# Altium PCB 24.067.PcbDoc
Units mm, origin at the board's own origin, x right, y up, seen from the top; angles counter-clockwise.
Board outline 37 x 22 mm, 2 copper layers (Top Layer, Bottom Layer); 3 components, 16 nets, 33 pads, 0 vias.
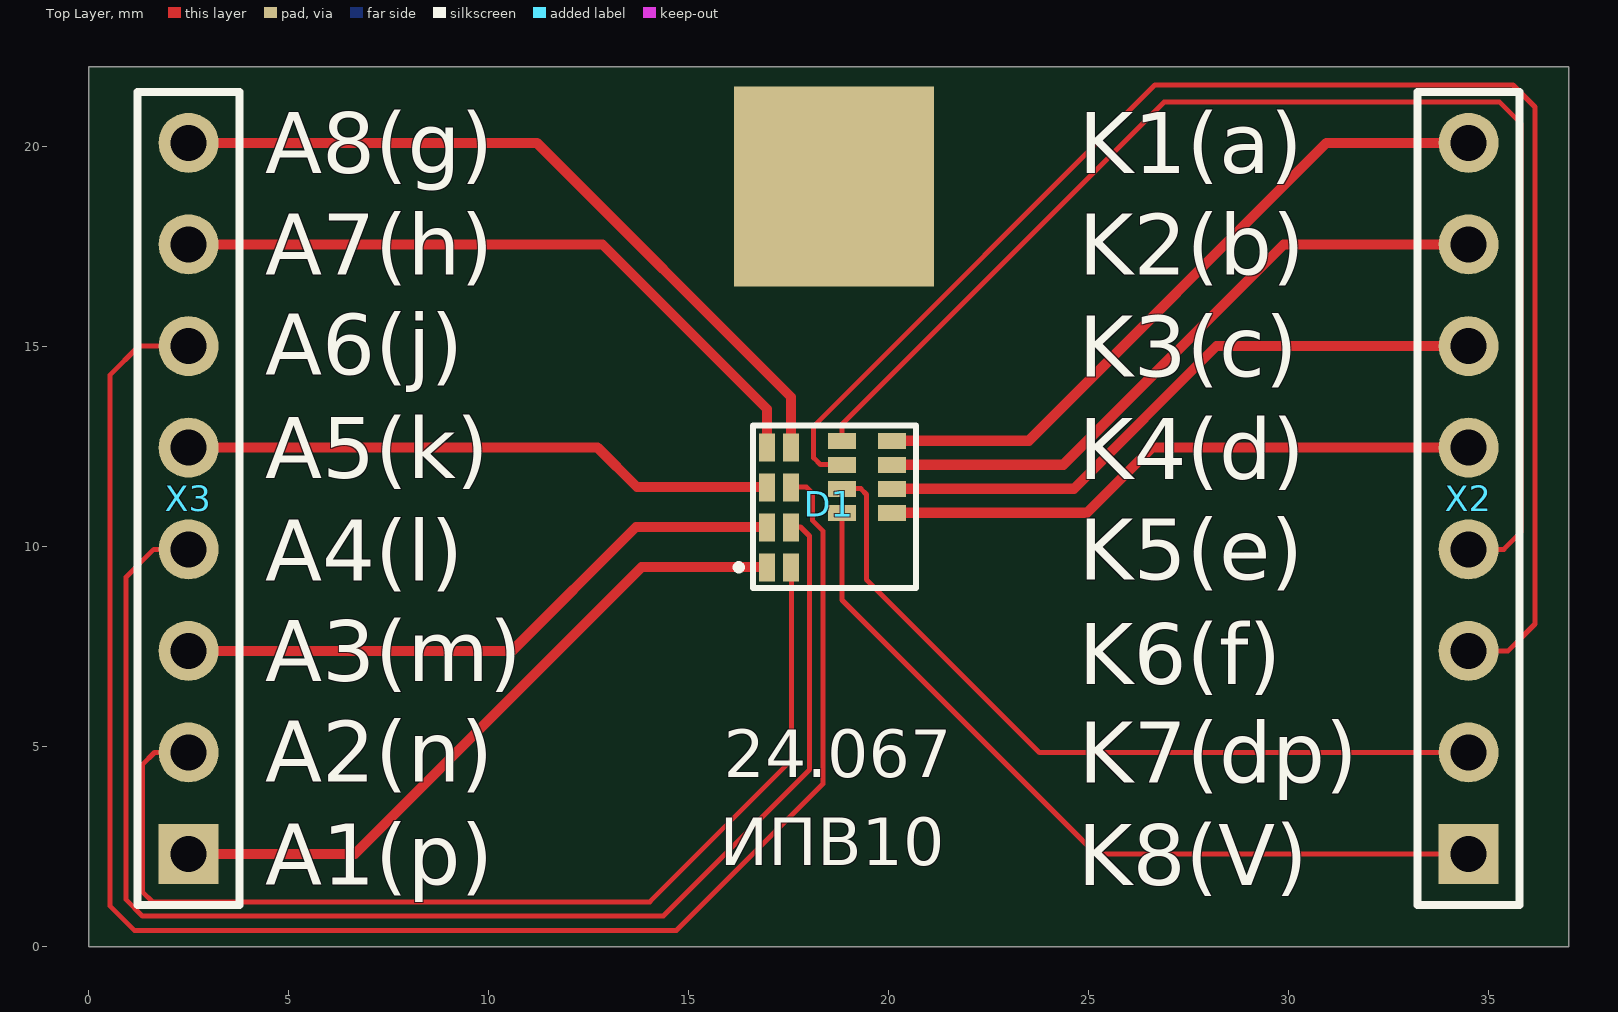
[diagram p0: Top Layer view]
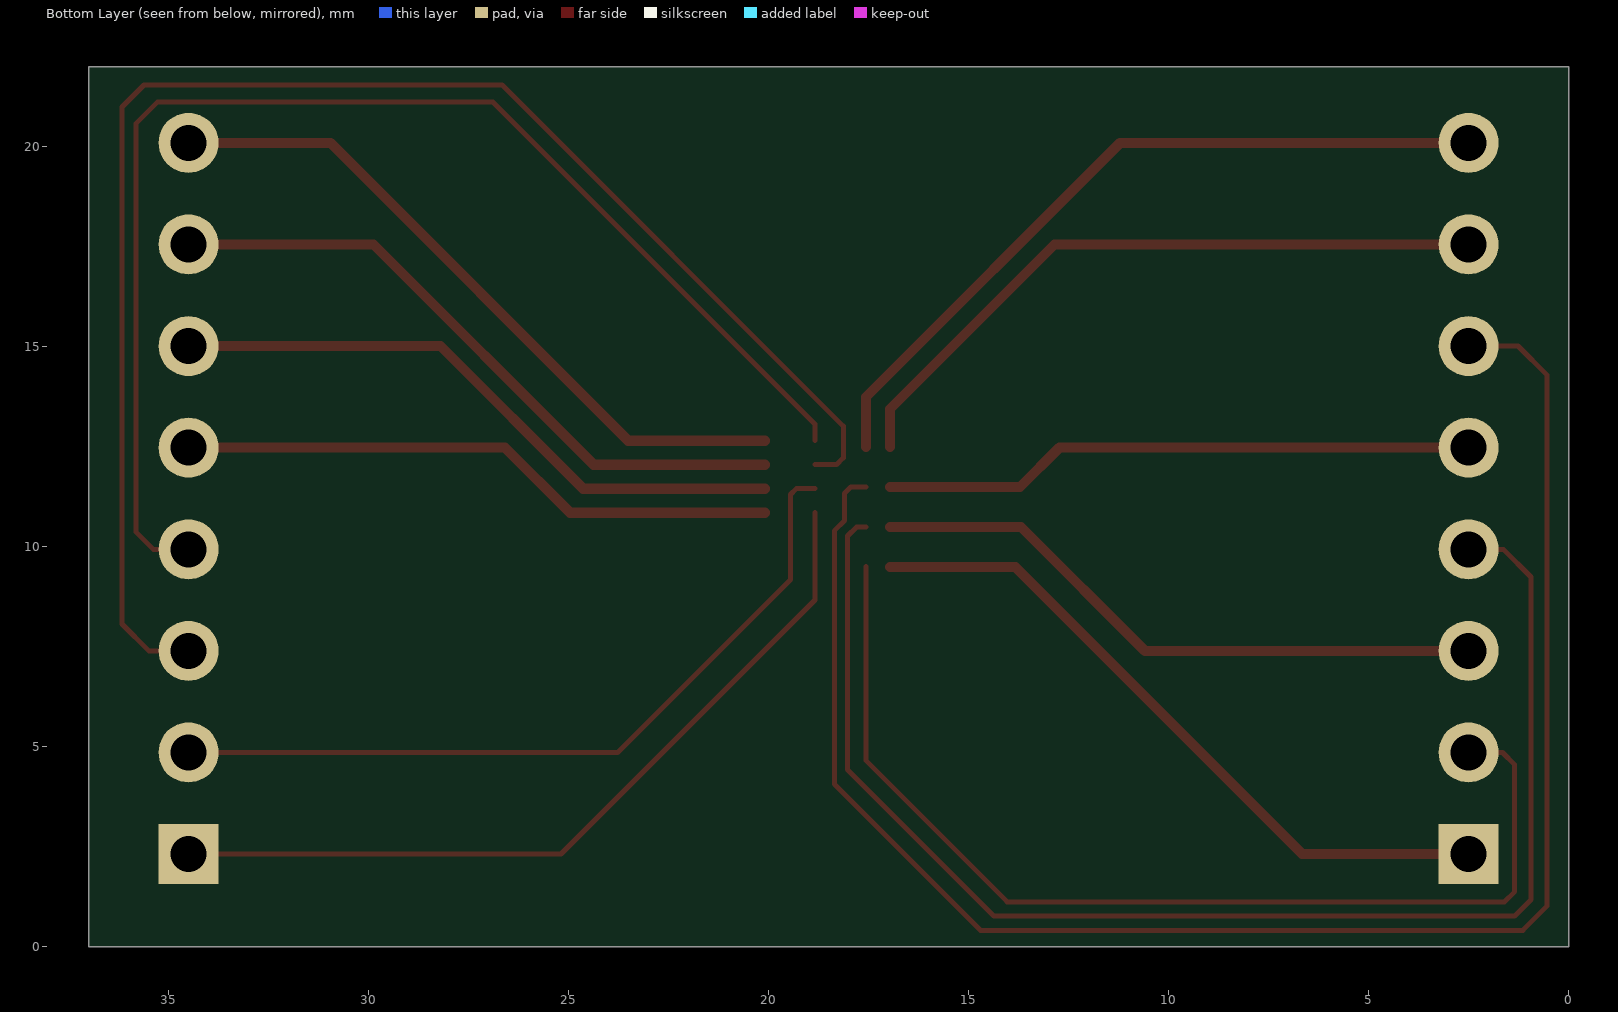
[diagram p1: Bottom Layer view, seen from below]

## Layer stack, top to bottom
Top Solder: solder mask 0.0102, Solder Resist, Dk 3.5
Top Layer: signal copper 0.0356
Dielectric 1: dielectric 0.32, FR-4, Dk 4.8
Bottom Layer: signal copper 0.0356
Bottom Solder: solder mask 0.0102, Solder Resist, Dk 3.5

## Board outline
37,0 37,22 0,22 0,0

## Design rules (kind name [scope] priority, off if disabled: settings)
Clearance [All] p1: gap=0.254 ignorepadtopadclearanceinfootprint=FALSE except(0: Arc-Hole Track-Hole SMDPad-Hole THPad-Hole Via-Hole Fill-Hole Poly-Hole Region-Hole Text-Hole; 0.2: Arc-Arc Arc-Track Arc-SMDPad Arc-THPad Track-Track Track-SMDPad Track-THPad SMDPad-SMDPad SMDPad-THPad THPad-THPad)
PolygonConnect [All] p1: connectstyle=Relief reliefconductorwidth=0.254 reliefentries=4 polygonreliefangle="90 Angle" airgapwidth=0.254
RoutingVias [All] p1: holewidth=0.711 width=1.27 viastyle="Through Hole" minholewidth=0.711 minwidth=1.27 maxholewidth=0.711 maxwidth=1.27
SolderMaskExpansion [All] p1: expansion=0.102
Width [All] p1: maxlimit=0.254 minlimit=0.125 preferedwidth=0.254
30 further rules are at their usual default settings.

## Components (designator, comment, footprint, x,y, rotation, side; value= is the part's Value field where it differs from the comment)
D1 "LED_8x8" LED_8x8 16.957,9.481 r0 top
X2 "Header 8" HDR1X8 34.5,2.311 r90 top
X3 "Header 8" HDR1X8 2.5,2.311 r90 top

## Footprints (in the part's own frame and the unit in brackets; to place one, negate y for a bottom-side part, rotate by r counter-clockwise, add the part's x,y. Pads: shape width x height; smd on the part's side, far side on the other; paste and mask are expansions set on the pad)
HDR1X8 [mm] "Connector; Header; 8 Position"
  rect 1.5x1.5 hole 0.9: 1(0,0)
  round 1.5 hole 0.9: 2(2.54,0) 3(5.08,0) 4(7.62,0) 5(10.16,0) 6(12.7,0) 7(15.24,0) 8(17.78,0)
  silkscreen extent -1.27,-1.27 19.05,1.27
LED_8x8 [mm] "24.067"
  rect 0.4x0.7 smd: 1(0,0) 2(0.6,0) 3(0,1) 4(0.6,1) 5(0,2) 6(0.6,2) 7(0,3) 8(0.6,3)
  rect 0.7x0.4 smd: 9(3.125,3.159) 10(3.125,2.559) 11(3.125,1.959) 12(3.125,1.359) 13(1.875,3.159) 14(1.875,2.559) 15(1.875,1.959) 16(1.875,1.359)
  silkscreen extent -0.72,-0.52 3.72,3.55

## Part data
X2 X3: "Header, 8-Pin", LatestRevisionDate=17-Jul-2002, LatestRevisionNote="Re-released for DXP Platform.", Publisher="Altium Limited"

## Free pads (board coordinates)
  rect 5x5 smd: 0(18.638,19.006)

## Nets (pads, with @x,y where several pads share a name; then routed paths per layer and width w, separated by ;. In a path a pad name is that pad's centre, name@x,y a point inside that pad or via, vN(x,y) a via of type N, cw(c..) or ccw(c..) an arc to the next point about the centre after c; other vN are vias at no path point)
A1: D1.1 X3.1 | length 17.4
  Top Layer w0.254: X3.1 6.655,2.311 13.83,9.487 D1.1@16.964,9.487
A2: D1.2 X3.2 | length 27.1
  Top Layer w0.125: X3.2 1.651,4.851 1.346,4.546 1.346,1.373 1.601,1.118 14.034,1.118 17.569,4.653 D1.2@17.569,9.5
A3: D1.3 X3.3 | length 15.7
  Top Layer w0.254: X3.3 10.592,7.391 13.687,10.487 D1.3@16.964,10.487
A4: D1.4 X3.4 | length 35.1
  Top Layer w0.125: X3.4 1.631,9.931 0.94,9.24 0.94,1.169 1.347,0.762 14.369,0.762 18.026,4.42 18.026,10.261 17.798,10.49 D1.4@17.569,10.49
A5: D1.5 X3.5 | length 14.9
  Top Layer w0.254: X3.5 12.729,12.471 13.713,11.487 D1.5@16.964,11.487
A6: D1.6 X3.6 | length 43.1
  Top Layer w0.125: X3.6 1.261,15.011 0.533,14.283 0.533,1.017 1.144,0.406 14.699,0.406 18.356,4.064 18.356,10.391 18.102,10.645 18.102,11.328 17.944,11.487 D1.6@17.564,11.487
A7: D1.7 X3.7 | length 17.1
  Top Layer w0.254: X3.7 12.849,17.551 16.964,13.436 D1.7@16.964,12.487
A8: D1.8 X3.8 | length 18.9
  Top Layer w0.254: X3.8 11.209,20.091 17.564,13.736 D1.8@17.564,12.487
K1: D1.9 X2.8 | length 17.7
  Top Layer w0.254: D1.9@20.089,12.646 23.505,12.646 30.95,20.091 X2.8 ; X2.8@34.562,20.091 X2.8@34.782,20.091
K2: D1.10 X2.7 | length 16.7
  Top Layer w0.254: D1.10@20.089,12.046 24.372,12.046 29.878,17.551 X2.7
K3: D1.11 X2.6 | length 15.9
  Top Layer w0.254: D1.11@20.089,11.446 24.636,11.446 28.201,15.011 X2.6
K4: D1.12 X2.5 | length 15.1
  Top Layer w0.254: D1.12@20.089,10.846 24.96,10.846 26.586,12.471 X2.5
K5: D1.13 X2.4 | length 32.6
  Top Layer w0.125: D1.13@18.839,12.646 18.839,13.06 26.886,21.107 35.281,21.107 35.808,20.58 35.808,10.358 35.381,9.931 X2.4
K6: D1.14 X2.3 | length 38.2
  Top Layer w0.125: D1.14@18.839,12.046 18.299,12.046 18.128,12.217 18.128,13.009 26.658,21.539 35.612,21.539 36.164,20.987 36.164,8.064 35.491,7.391 X2.3
K7: D1.15 X2.2 | length 19.6
  Top Layer w0.125: D1.15@18.839,11.446 19.306,11.446 19.451,11.3 19.451,9.169 23.769,4.851 X2.2
K8: D1.16 X2.1 | length 20.5
  Top Layer w0.125: D1.16@18.839,10.846 18.839,8.661 25.189,2.311 X2.1

## Silkscreen, mask and mechanical layers (free items; w line width, h text height)
Top Overlay:
  text "A8(g)" at 4.42,19.329 h1.52
  text "K1(a)" at 24.753,19.329 h1.52
  text "A7(h)" at 4.42,16.789 h1.52
  text "K2(b)" at 24.753,16.789 h1.52
  text "A6(j)" at 4.42,14.3 h1.52
  text "K3(c)" at 24.753,14.249 h1.52
  text "A5(k)" at 4.42,11.709 h1.52
  text "K4(d)" at 24.753,11.684 h1.52
  text "K5(e)" at 24.753,9.169 h1.52
  text "A4(l)" at 4.42,9.144 h1.52
  text "A3(m)" at 4.42,6.629 h1.52
  text "K6(f)" at 24.753,6.553 h1.52
  text "A2(n)" at 4.42,4.115 h1.52
  text "K7(dp)" at 24.753,4.089 h1.52
  text "24.067" at 15.875,3.842 h2.03
  text "ИПВ10" at 15.775,1.642 h2.03
  text "A1(p)" at 4.42,1.549 h1.52
  text "K8(V)" at 24.734,1.531 h1.52
Mechanical 1:
  the board outline again, w0.254